# Altium PCB 蓝牙板.PcbDoc
Units mil, origin at the board's own origin, x right, y up, seen from the top; angles counter-clockwise.
Board outline 830 x 1130 mil, 2 copper layers (Top Layer, Bottom Layer); 11 components, 27 nets, 77 pads, 33 vias.
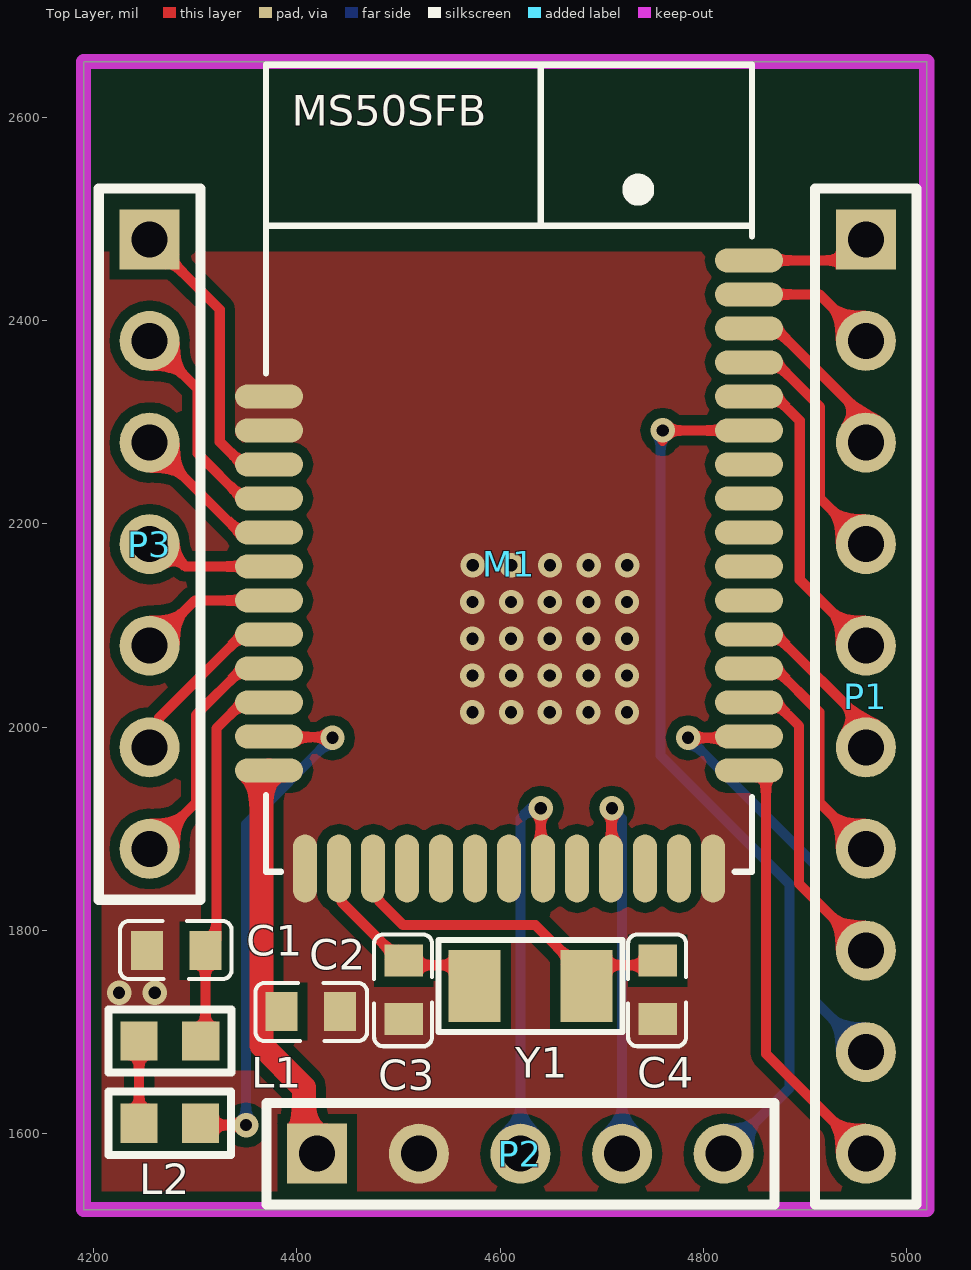
[diagram p0: Top Layer view]
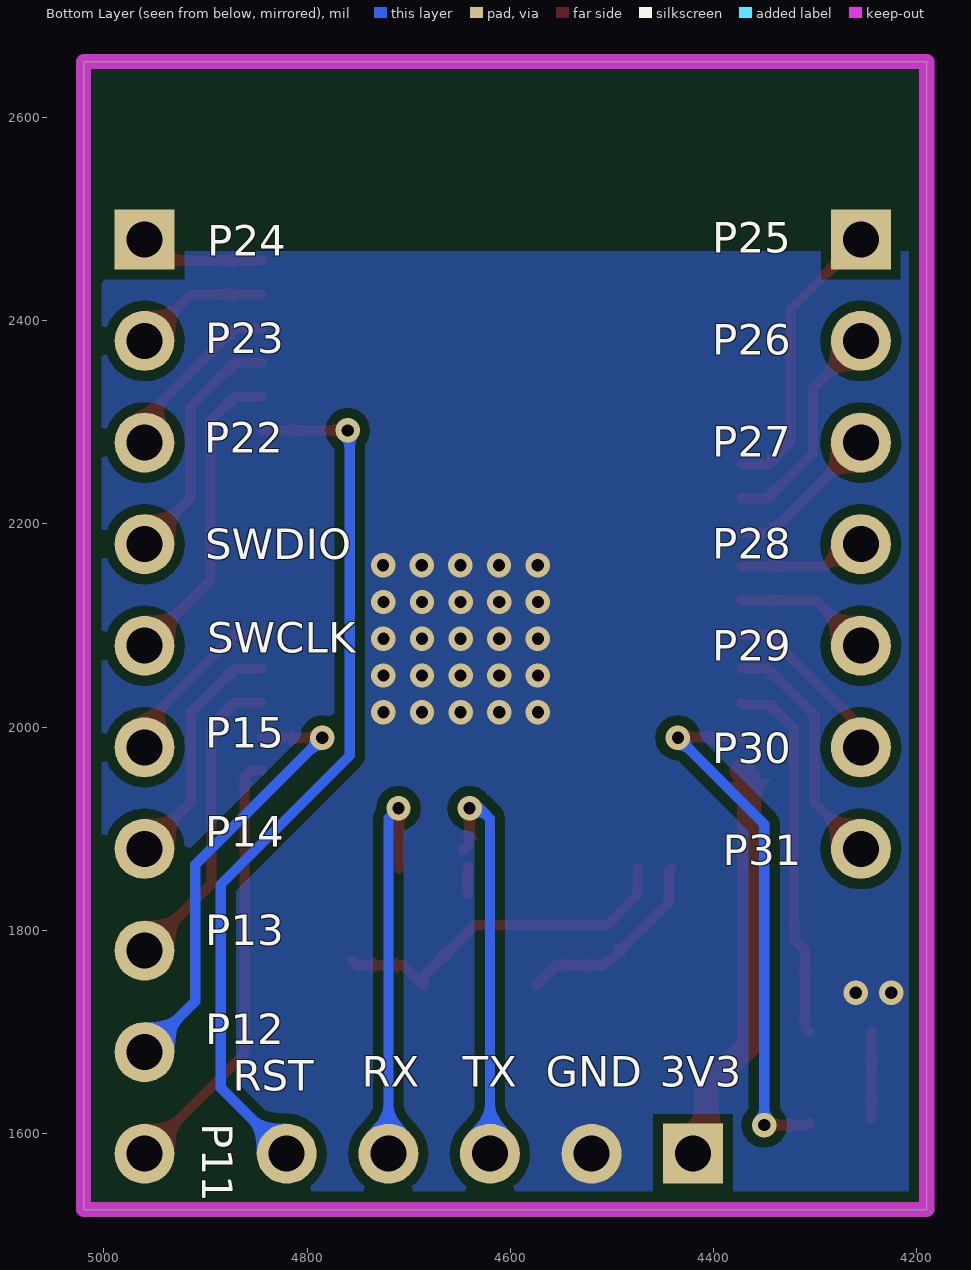
[diagram p1: Bottom Layer view, seen from below]
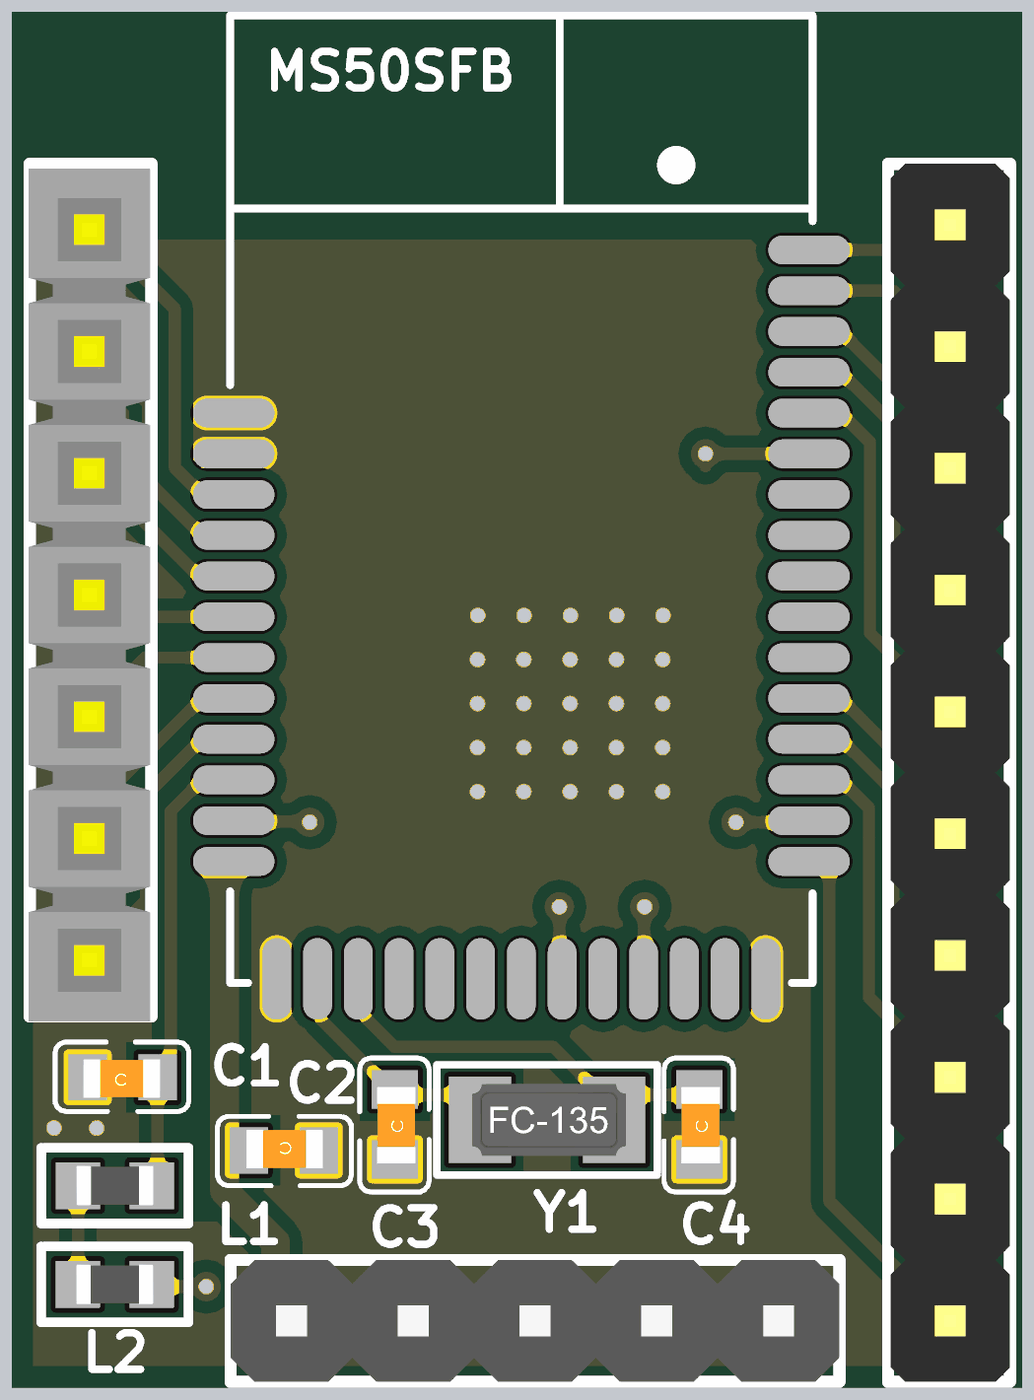
[diagram p2: 3D render of the assembled board from above, using the file's embedded part models]

## Layer stack, top to bottom
Top Solder: solder mask 0.4, Solder Resist, Dk 3.5
Top Layer: signal copper 1.4
Dielectric 1: dielectric 12.6, FR-4, Dk 4.8
Bottom Layer: signal copper 1.4
Bottom Solder: solder mask 0.4, Solder Resist, Dk 3.5

## Board outline
4190,1525 5020,1525 5020,2655 4190,2655

## Design rules (kind name [scope] priority, off if disabled: settings)
Clearance [All] p1: gap=10 ignorepadtopadclearanceinfootprint=TRUE except(0: Arc-Hole Track-Hole SMDPad-Hole THPad-Hole Via-Hole Fill-Hole Poly-Hole Region-Hole Text-Hole)
PlaneConnect [All] p1: planeconnectstyle=Direct reliefexpansion=20 reliefentries=4 reliefconductorwidth=10 reliefairgap=10
PolygonConnect [All] p1: connectstyle=Direct reliefconductorwidth=10 reliefentries=4 polygonreliefangle="90 Angle" airgapwidth=10
RoutingVias [All] p1: holewidth=28 width=50 viastyle="Through Hole" minholewidth=10 minwidth=10 maxholewidth=28 maxwidth=50
SolderMaskExpansion [All] p1: expansion=4
Width [All] p1: maxlimit=1000 minlimit=10 preferedwidth=10 minimp=50.000000 maximp=50.000000 favimp=50.000000
29 further rules are at their usual default settings.

## Components (designator, comment, footprint, x,y, rotation, side; value= is the part's Value field where it differs from the comment)
C1 "1uf" CAP[0603] 4252.62,1780 r0 top
C2 "1uf" CAP[0603] 4442.38,1720 r180 top
C3 "15pf" CAP[0603] 4505,1712.62 r90 top
C4 "15pf" CAP[0603] 4755,1712.62 r90 top
L1 "15nh" 0603_L 4275,1691 r0 top
L2 "10uh" 0603_L 4274.93,1610 r180 top
M1 "MS50SFB" MS50SFB_V3.0 4372.56,2325.39 r0 top
P1 "Header 1X10" "HEADER 1X10" 4960,2030 r270 top
P2 "Header 1X5" "HEADER 1X5" 4620,1580 r0 top
P3 "Header 1X7" "HEADER 1X7" 4255,2180 r270 top
Y1 "XTAL" XTAL-3215 4574.76,1745 r0 top

## Footprints (in the part's own frame and the unit in brackets; to place one, negate y for a bottom-side part, rotate by r counter-clockwise, add the part's x,y. Pads: shape width x height; smd on the part's side, far side on the other; paste and mask are expansions set on the pad)
0603_L [mm]
  rect 0.93x0.98 smd: 1(-0.77,0) 2(0.77,0)
  silkscreen extent -1.54,-0.79 1.53,0.79, body extent -0.82,-0.41 0.83,0.41, height 0.46
CAP[0603] [mm]
  rect 0.8x0.965 smd: 1(0,0) 2(1.457,0)
  silkscreen extent -0.68,-0.71 2.11,0.74, body extent -0.09,-0.43 1.51,0.38, height 0.88
"HEADER 1X5" [mm] "2.54"
  rect 1.5x1.5 hole 0.9: 1(-5.08,0)
  round 1.5 hole 0.9: 2(-2.54,0) 3(0,0) 4(2.54,0) 5(5.08,0)
  silkscreen extent -6.35,-1.27 6.35,1.27, body extent -6.35,-1.27 6.35,1.27, height 8.54
"HEADER 1X7" [mm]
  rect 1.5x1.5 hole 0.9: 1(-7.62,0)
  round 1.5 hole 0.9: 2(-5.08,0) 3(-2.54,0) 4(0,0) 5(2.54,0) 6(5.08,0) 7(7.62,0)
  silkscreen extent -8.89,-1.27 8.89,1.27, body extent -8.79,-1.3 8.99,1.24, height 8.89
"HEADER 1X10" [mm]
  rect 1.5x1.5 hole 0.9: 1(-11.43,0)
  round 1.5 hole 0.9: 2(-8.89,0) 3(-6.35,0) 4(-3.81,0) 5(-1.27,0) 6(1.27,0) 7(3.81,0) 8(6.35,0) 9(8.89,0) 10(11.43,0)
  silkscreen extent -12.7,-1.27 12.7,1.27, body extent -12.7,-1.22 12.7,1.27, height 8.54
MS50SFB_V3.0 [mm]
  oval 1.7x0.6 smd mask+0.06: 1(0,0) 2(0,-0.85) 3(0,-1.7) 4(0,-2.55) 5(0,-3.4) 6(0,-4.25) 7(0,-5.1) 8(0,-5.95) 9(0,-6.8) 10(0,-7.65) 11(0,-8.5) 12(0,-9.35) 26(12,-9.35) 27(12,-8.5) 28(12,-7.65) 29(12,-6.8) 30(12,-5.95) 31(12,-5.1) 32(12,-4.25) 33(12,-3.4) 34(12,-2.55) 35(12,-1.7) 36(12,-0.85) 37(12,0) 38(12,0.85) 39(12,1.701) 40(12,2.551) 41(12,3.401)
  oval 0.6x1.7 smd mask+0.06: 13(0.9,-11.8) 14(1.75,-11.8) 15(2.6,-11.8) 16(3.45,-11.8) 17(4.3,-11.8) 18(5.15,-11.8) 19(6,-11.8) 20(6.85,-11.8) 21(7.7,-11.8) 22(8.55,-11.8) 23(9.4,-11.8) 24(10.25,-11.8) 25(11.1,-11.8)
  silkscreen extent -0.08,-11.88 12.08,8.29
XTAL-3215 [mm]
  rect 1.3x1.8 smd: 1(0,0) 2(2.8,0)
  silkscreen extent -0.9,-1.15 3.7,1.15, body extent -0.16,-0.75 3.04,0.75, height 0.8

## Part data
C1 C2 C3 C4: library part Cap
L1 L2: library part inductor
M1: library part MS50SFB_V3.0

## Via types
v1: diameter 24, hole 12, Top Layer to Bottom Layer, tented both sides, 33 vias

## Nets (pads, with @x,y where several pads share a name; then routed paths per layer and width w, separated by ;. In a path a pad name is that pad's centre, name@x,y a point inside that pad or via, vN(x,y) a via of type N, cw(c..) or ccw(c..) an arc to the next point about the centre after c; other vN are vias at no path point)
3.3V: C2.2 M1.12 P2.1 | length 403
  Top Layer w23.62: M1.12@4372.56,1957.13 4365,1949.57 4365,1686.75 4406.79,1644.96 4406.79,1593.21 P2.1
GND: C1.1 C2.1 C3.1 C4.1 M1.1 M1.2 M1.13 M1.25 P2.2
  other v1: 4225,1738.37 4260,1738.37 4572.77,2014.53 4610.8,2014.53 4648.83,2014.53 4686.86,2014.53 4724.9,2014.53 4572.77,2050.7 4610.8,2050.7 4648.83,2050.7 4686.86,2050.7 4724.9,2050.7 4572.77,2086.87 4610.8,2086.87 4648.83,2086.87 4686.86,2086.87 4724.9,2086.87 4572.77,2123.04 4610.8,2123.04 4648.83,2123.04 4686.86,2123.04 4724.9,2123.04 4573,2159.21 4611.04,2159.21 4649.07,2159.21 4687.1,2159.21 4725.13,2159.21
NetC1_2: C1.2 L1.2 M1.10 | length 367.4
  Top Layer w10: L1.2@4305.31,1700 4310,1704.69 C1.2 4320.75,1790.75 4320.75,1998.51 4343.85,2021.61 4369.95,2021.61 M1.10
NetC3_2: C3.2 M1.14 Y1.1 | length 199.2
  Top Layer w10: M1.14 4444.06,1858.22 4444.06,1827.69 4501.75,1770 C3.2 4509.41,1765.59 4554.17,1765.59 Y1.1
NetC4_2: C4.2 M1.15 Y1.2 | length 359.5
  Top Layer w10: M1.15 4474.92,1835.49 4481.57,1828.83 4481.57,1828.07 4504.64,1805 4634.84,1805 4685,1754.84 Y1.2 4705.59,1765.59 4750.59,1765.59 C4.2
NetL1_1: L1.1 L2.2 | length 85
  Top Layer w10: L2.2@4244.69,1615 L1.1@4244.69,1700
NetL2_1: L2.1 M1.11 | length 524.9
  Top Layer w10: L2.1 4307.06,1608.19 v1(4350,1608.19) ; M1.11 4373.24,1990.07 4434.32,1990.07 v1(4435,1989.39)
  Bottom Layer w10: v1(4350,1608.19) 4350,1904.39 v1(4435,1989.39)
NetM1_3: M1.3 P3.1 | length 285.5
  Top Layer w10: P3.1 4324.09,2410.91 4324.09,2280.82 4346.45,2258.46 M1.3
NetM1_4: M1.4 P3.2 | length 219
  Top Layer w10: P3.2 4302.09,2332.91 4302.09,2269.36 4346.45,2225 M1.4
NetM1_5: M1.5 P3.3 | length 154.2
  Top Layer w10: P3.3 4343.46,2191.54 M1.5
NetM1_6: M1.6 P3.4 | length 126.6
  Top Layer w10: P3.4 4268.27,2180 4290.2,2158.07 M1.6
NetM1_7: M1.7 P3.5 | length 136
  Top Layer w10: P3.5 4299.61,2124.61 M1.7
NetM1_8: M1.8 P3.6 | length 175.1
  Top Layer w10: P3.6 4264.39,1989.39 4264.39,2009.07 4346.45,2091.14 M1.8
NetM1_9: M1.9 P3.7 | length 241.7
  Top Layer w10: P3.7 4300.75,1925.75 4300.75,2011.97 4346.45,2057.68 M1.9
NetM1_26: M1.26 P1.10 | length 431
  Top Layer w10: M1.26 4855.36,1957.28 4861.65,1950.99 4861.65,1678.35 P1.10
NetM1_27: M1.27 P1.9 | length 447.9
  Top Layer w10: v1(4785,1989.39) 4835.13,1989.39 4840.75,1995 M1.27 M1.27@4843.64,1989.39
  Bottom Layer w10: v1(4785,1989.39) 4910,1864.39 4910,1730 P1.9
NetM1_28: M1.28 P1.8 | length 307.1
  Top Layer w10: M1.28 4871.11,2024.21 4894.19,2001.13 4894.19,1845.81 P1.8
NetM1_29: M1.29 P1.7 | length 240.6
  Top Layer w10: M1.29 4871.11,2057.68 4914.19,2014.6 4914.19,1925.81 P1.7
NetM1_30: M1.30 P1.6 | length 187.3
  Top Layer w10: M1.30 4871.11,2091.14 4960,2002.25 P1.6 P1.6@4950.61,1989.39
NetM1_37: M1.37 P1.5 | length 308.3
  Top Layer w10: M1.37 4871.11,2325.39 4895,2301.5 4895,2145 P1.5
NetM1_38: M1.38 P1.4 | length 241.8
  Top Layer w10: M1.38 4871.09,2358.87 4915,2314.96 4915,2225 P1.4
NetM1_39: M1.39 P1.3 | length 188.5
  Top Layer w10: M1.39 4871.09,2392.35 4960,2303.44 P1.3 P1.3@4950.61,2289.39
NetM1_40: M1.40 P1.2 | length 134
  Top Layer w10: M1.40 4914.18,2425.82 P1.2
NetM1_41: M1.41 P1.1 | length 123.6
  Top Layer w10: M1.41 4939.3,2459.3 P1.1
RST: M1.36 P2.5 | length 887.4
  Top Layer w10: v1@4760,2281.79 v1(4760,2291.93) M1.36
  Bottom Layer w10: v1(4760,2291.93) 4758,2289.93 4758,1972 4885,1845 4885,1645 P2.5
RXD: M1.22 P2.4 | length 403.7
  Top Layer w10: M1.22 4709.59,1861.24 4709.59,1919.59 v1(4710,1920)
  Bottom Layer w10: v1(4710,1920) 4720,1910 P2.4
TXD: M1.20 P2.3 | length 425.1
  Top Layer w10: v1(4640,1920) 4640,1885 M1.20@4646.38,1878.62 ; M1.20@4641.12,1861.95 M1.20 M1.20@4642.24,1835.49
  Bottom Layer w10: P2.3 4620,1910 4630,1920 v1(4640,1920)
pads on no net: M1.16 M1.17 M1.18 M1.19 M1.21 M1.23 M1.24 M1.31 M1.32 M1.33 M1.34 M1.35

## Polygon pours and split planes (outlines as drawn)
GND on Top Layer "NONET_L-01_P-001" (solid, remove dead copper, pour order 0): 5006.44,1534.79 5006.44,2468 4201.44,2468 4201.44,1533.79
GND on Bottom Layer "NONET_L-01_P-001" (solid, remove dead copper, pour order 4): 5005.81,1534.19 5005.81,2468.19 4200.81,2468.19 4200.81,1533.19

## Keep-outs
Keep-Out Layer:
  the board outline again, w15

## Other copper
Top Layer:
  pour cut-out: 4333.62,1661.71 4360,1661.71 4360,1670 4333.62,1670

## Silkscreen, mask and mechanical layers (free items; w line width, h text height)
Bottom Overlay:
  text "P25" at 4401,2467 h30
  text "P24" at 4898,2464 h30
  text "P23" at 4900,2368 h30
  text "P26" at 4401,2366.5 h30
  text "P22" at 4901,2270 h30
  text "P27" at 4401,2266 h30
  text "P28" at 4401,2165.5 h30
  text "SWDIO" at 4900,2165 h30
  text "SWCLK" at 4898,2073 h30
  text "P29" at 4401,2065 h30
  text "P15" at 4900,1979.38 h30
  text "P30" at 4401,1964.5 h30
  text "P14" at 4900,1882.25 h30
  text "P31" at 4391,1864 h30
  text "P13" at 4900,1785.12 h30
  text "P12" at 4900,1688 h30
  text "3V3" at 4453,1646 h30
  text "GND" at 4565,1646 h30
  text "TX" at 4647,1646 h30
  text "RX" at 4746,1646 h30
  text "RST" at 4873,1642 h30
  text "P11" at 4903,1610 h30 r90

## Text inside footprints (layer, text, board x,y; h text height)
M1: Mechanical 15 "IPEX/U.FL" at 4666.65,2571.85 h19.68